# Altium PCB giro_poligon_GND.PcbDoc
Units mm, origin at the board's own origin, x right, y up, seen from the top; angles counter-clockwise.
Board outline 34.03 x 24.84 mm, 2 copper layers (Top Layer, Bottom Layer); 9 components, 9 nets, 38 pads, 0 vias.
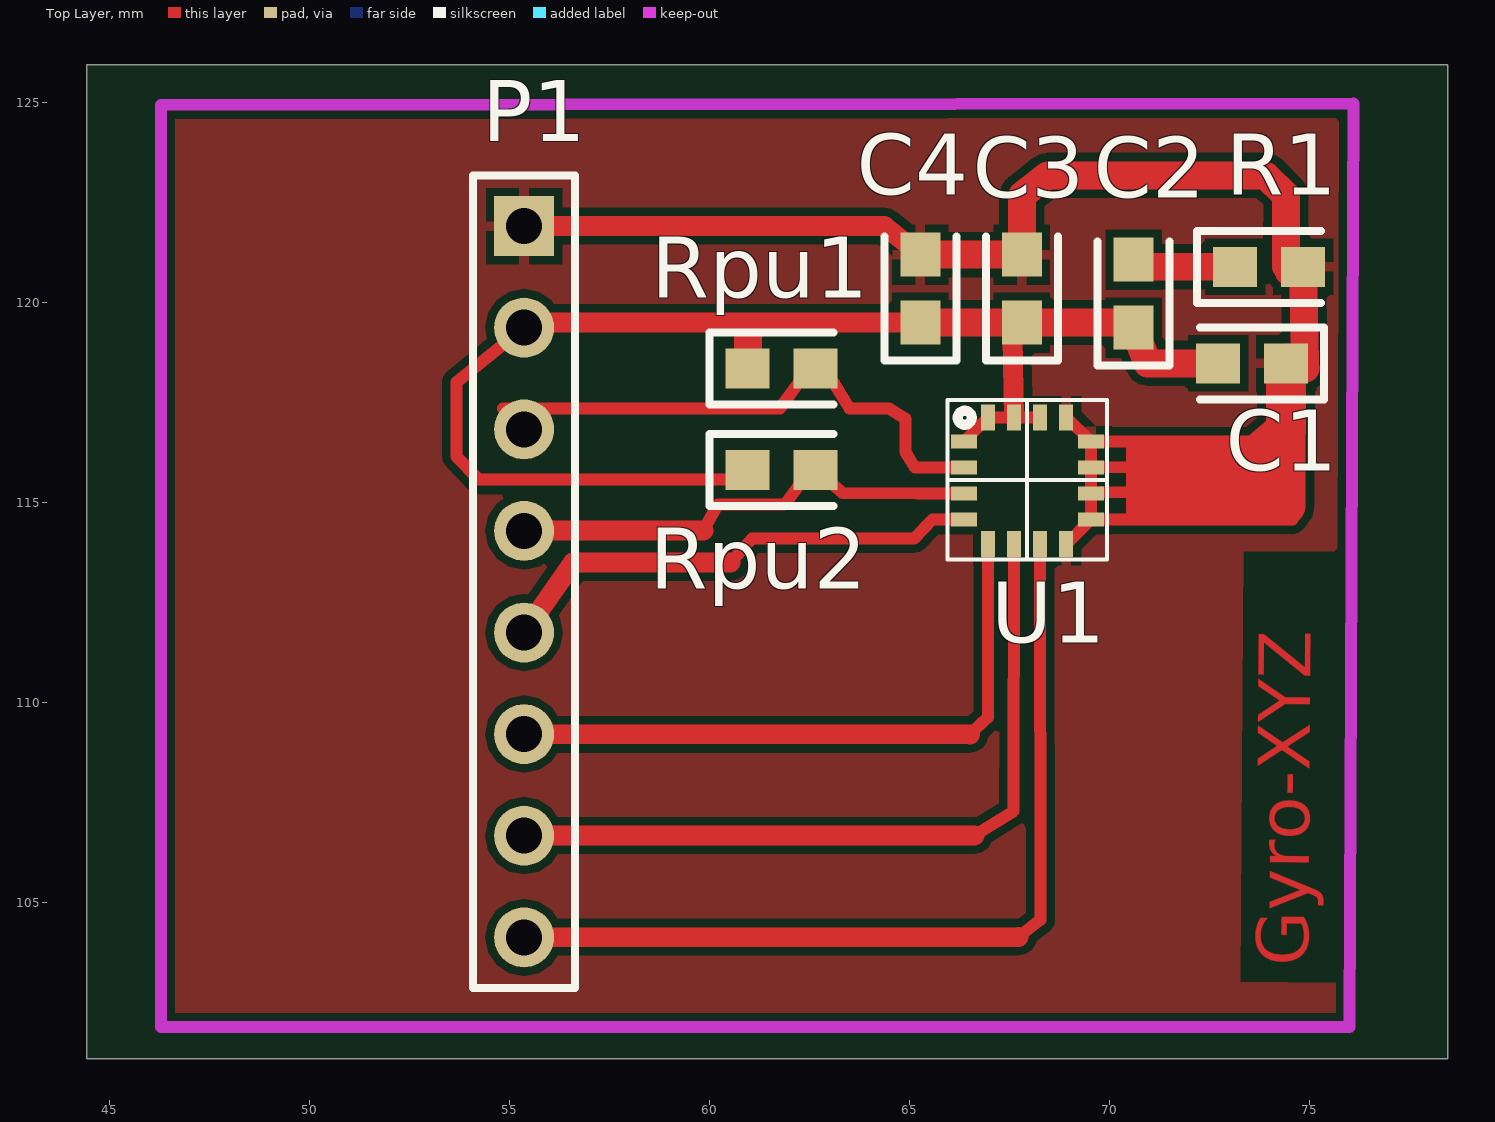
[diagram p0: Top Layer view]
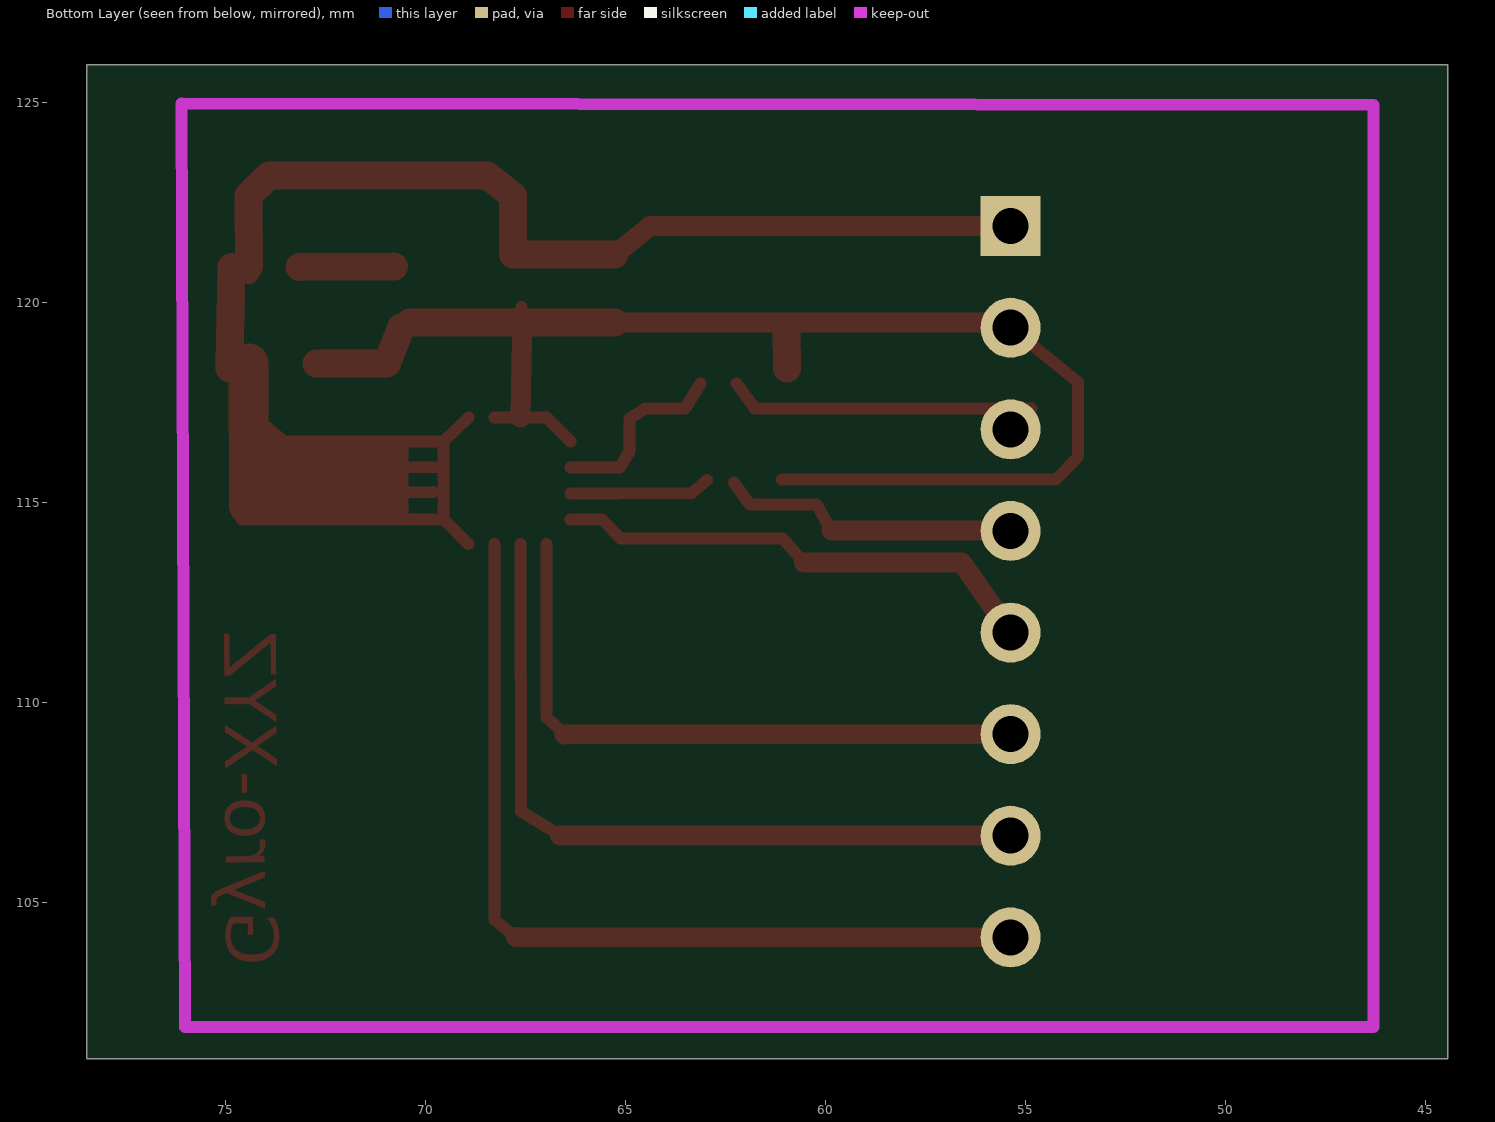
[diagram p1: Bottom Layer view, seen from below]

## Layer stack, top to bottom
Top Layer: signal copper 0.0356
Dielectric: dielectric 0.32, FR-4, Dk 4.8
Bottom Layer: signal copper 0.0356

## Board outline
44.44,125.955 44.44,101.11 78.47,101.11 78.47,125.955

## Design rules (kind name [scope] priority, off if disabled: settings)
Clearance [All] p1: gap=0.2
ComponentClearance [All] p1: gap=0.254 collisioncheckmode=0
PolygonConnect [All] p1: connectstyle=Relief reliefconductorwidth=0.254 reliefentries=4 polygonreliefangle="90 Angle"
RoutingVias [All] p1: holewidth=0.6 width=1 viastyle="Through Hole" minholewidth=0.711 minwidth=1.27 maxholewidth=0.711 maxwidth=1.27
SolderMaskExpansion [All] p1: expansion=0.102
TestPointUsage [All] p1: valid=0 allowmultiple=FALSE
Testpoint [All] p1: side=15 testpointundercomponent=TRUE minsize=1.016 maxsize=2.54 preferedsize=1.524 minholesize=0 maxholesize=1.016 preferedholesize=0.813 testpointgrid=0.025 style=1023 order=0-112345678
Width [All] p1: maxlimit=1 minlimit=0.2 preferedwidth=0.5
17 further rules are at their usual default settings.

## Components (designator, comment, footprint, x,y, rotation, side; value= is the part's Value field where it differs from the comment)
C1 "10nF" 0603 74.422,118.491 r180 top
C2 "470F" 0603 70.612,119.38 r90 top
C3 "10nF" 0603 67.818,119.507 r90 top
C4 "100nF" 0603 65.278,119.507 r90 top
P1 "Header 8" HDR1X8 55.372,121.92 r270 top
R1 "10k" 0603 73.152,120.904 r0 top
Rpu1 "10k" 0603 60.96,118.364 r0 top
Rpu2 "10k" 0603 60.96,115.824 r0 top
U1 "L3G4200D" L3G4200D 67.945,115.57 r0 top

## Footprints (in the part's own frame and the unit in brackets; to place one, negate y for a bottom-side part, rotate by r counter-clockwise, add the part's x,y. Pads: shape width x height; smd on the part's side, far side on the other; paste and mask are expansions set on the pad)
0603 [mm] "0603"
  rect 1.1x1 smd: 1(0,0) 2(1.7,0)
  silkscreen extent -0.95,-0.9 2.15,0.9
HDR1X8 [mm] "Connector; Header; 8 Position"
  rect 1.5x1.5 hole 0.9: 1(0,0)
  round 1.5 hole 0.9: 2(2.54,0) 3(5.08,0) 4(7.62,0) 5(10.16,0) 6(12.7,0) 7(15.24,0) 8(17.78,0)
  silkscreen extent -1.27,-1.27 19.05,1.27
L3G4200D [mm] "Giro 3-Axis"
  rect 0.65x0.35 smd: 1(-1.57,0.97) 2(-1.57,0.32) 3(-1.57,-0.33) 4(-1.57,-0.98) 9(1.6,-0.98) 10(1.6,-0.33) 11(1.6,0.32) 12(1.6,0.97)
  rect 0.35x0.65 smd: 5(-0.97,-1.6) 6(-0.32,-1.6) 7(0.33,-1.6) 8(0.98,-1.6) 13(0.98,1.57) 14(0.33,1.57) 15(-0.32,1.57) 16(-0.97,1.57)
  silkscreen extent -1.99,-1.99 2,2

## Part data
C1 C2 C3 C4: library part Cap, "Capacitor"
P1: "Header, 8-Pin"
R1 Rpu1 Rpu2: library part "Res Semi", "Semiconductor Resistor"
U1: "Giro 3 axis"

## Nets (pads, with @x,y where several pads share a name; then routed paths per layer and width w, separated by ;. In a path a pad name is that pad's centre, name@x,y a point inside that pad or via, vN(x,y) a via of type N, cw(c..) or ccw(c..) an arc to the next point about the centre after c; other vN are vias at no path point)
CS: P1.6 U1.5 | length 16.1
  Top Layer w0.3: 66.52,109.21 66.97,109.64 U1.5
  Top Layer w0.5: P1.6 66.52,109.21
DRDY/INT2: P1.7 U1.6 | length 19.1
  Top Layer w0.3: 66.635,106.69 67.615,107.295 U1.6
  Top Layer w0.5: P1.7 66.635,106.69
GND: C1.1 C3.2 C4.2 P1.1 R1.2 U1.8 U1.9 U1.10 U1.11 U1.12 U1.13 | length 49.6
  Top Layer w0.3: U1.8 U1.9 ; U1.13 U1.12 ; U1.11 71.055,115.895 73.47,115.885 ; U1.10@69.815,115.27 73.025,115.265 ; 74.095,116.54 U1.12 ; 74.59,114.58 U1.9 ; U1.9 U1.12
  Top Layer w0.5: P1.1 64.389,121.92 C4.2 ; R1.2@74.415,120.72 R1.2@74.416,120.906
  Top Layer w0.7: C4.2 C3.2 67.818,122.682 68.453,123.19 73.914,123.19 74.422,122.682 R1.2@74.416,120.906 ; R1.2 74.902,118.501 C1.1@74.905,118.365
  Top Layer w1: 74.415,114.935 C1.1
INT1: P1.8 U1.7 | length 22.5
  Top Layer w0.3: 67.74,104.15 68.28,104.575 U1.7@68.27,113.97
  Top Layer w0.5: P1.8 67.74,104.15
NetC2_2: C2.2 R1.1 | length 2.4
  Top Layer w0.7: C2.2@70.79,120.905 R1.1
SCL/SPC: P1.3 Rpu1.2 U1.2 | length 12.4
  Top Layer w0.3: P1.3@54.85,117.365 61.77,117.365 Rpu1.2@62.22,117.985 ; Rpu1.2@63.13,117.985 63.51,117.365 64.49,117.365 64.905,117.105 64.905,116.28 65.145,115.885 U1.2
SDA/SDI/SDO: P1.4 Rpu2.2 U1.3 | length 10.7
  Top Layer w0.3: 59.855,114.315 60.22,114.955 61.89,114.955 Rpu2.2@62.29,115.505 ; Rpu2.2@62.96,115.575 63.34,115.245 65.2,115.24 U1.3
  Top Layer w0.5: P1.4@55.815,114.315 59.855,114.315
SDO/SA0: P1.5 U1.4 | length 12.4
  Top Layer w0.3: 60.54,113.51 61.07,114.11 65.12,114.11 65.58,114.58 U1.4
  Top Layer w0.5: P1.5 56.6,113.51 60.54,113.51
VCC: C1.2 C2.1 C3.1 C4.1 P1.2 Rpu1.1 Rpu2.1 U1.1 U1.14 U1.15 U1.16 | length 36.2
  Top Layer w0.3: P1.2 53.685,118.02 53.685,116.16 54.245,115.58 Rpu2.1@61.085,115.58 ; U1.1 U1.16 U1.14 ; C3.1@67.6,119.9 67.604,119.507 C3.1@67.604,119.505
  Top Layer w0.5: P1.2@55.65,119.515 55.075,119.515 55.372,119.515 60.98,119.51 C4.1 ; C3.1@67.604,119.505 67.59,119.135 U1.15
  Top Layer w0.7: Rpu1.1 60.98,119.41 ; C4.1 C3.1 C2.1@70.385,119.51 ; C2.1 70.965,118.49 C1.2

## Polygon pours and split planes (outlines as drawn)
GND on Top Layer (solid, remove dead copper): 45.635,125.43 45.635,101.545 77.6,101.545 77.6,125.61 45.75,125.61

## Keep-outs
Keep-Out Layer:
  lines w0.3: 46.295,124.945 76.105,124.99 76.015,101.895 46.3,101.895 46.295,124.945

## Other copper
Top Layer:
  region net GND: 74.424,116.752 74.065,117.174 73.389,116.6 73.749,116.177
  rectangle net GND: 72.33,116.1 73.715,116.56
  region net GND: 72.66,114.83 73.497,116.101 72.711,116.619 71.873,115.348
  rectangle net GND: 70.42,114.58 74.59,116.555
  text "Gyro-XYZ" at 74.975,103.415 h1.3 r89.56